# EAGLE board MSP-EXP432P401R_EagleCAD (EAGLE 9.6.0), part 1 of 2
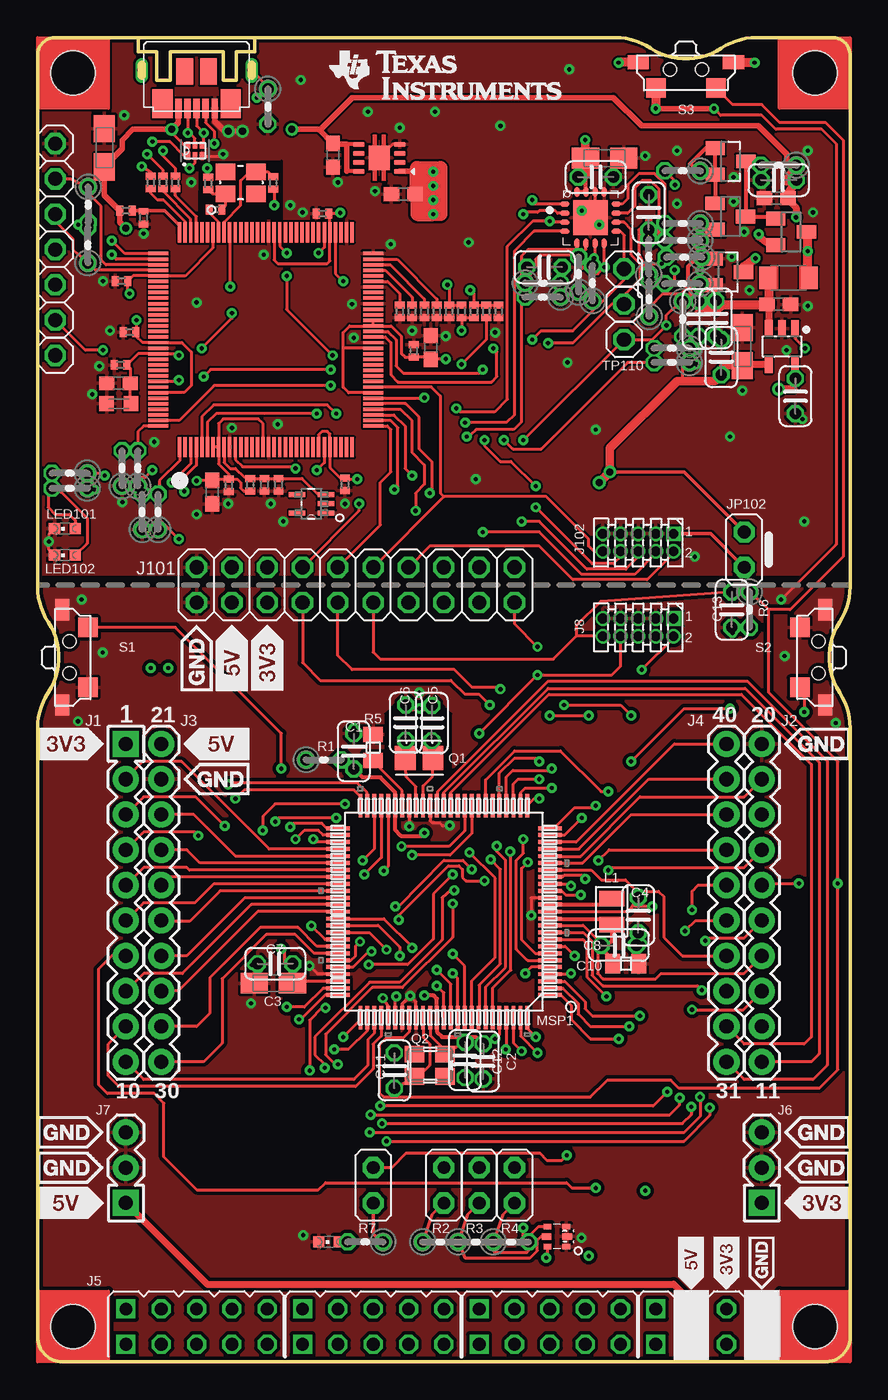
[diagram p0: board, top side]
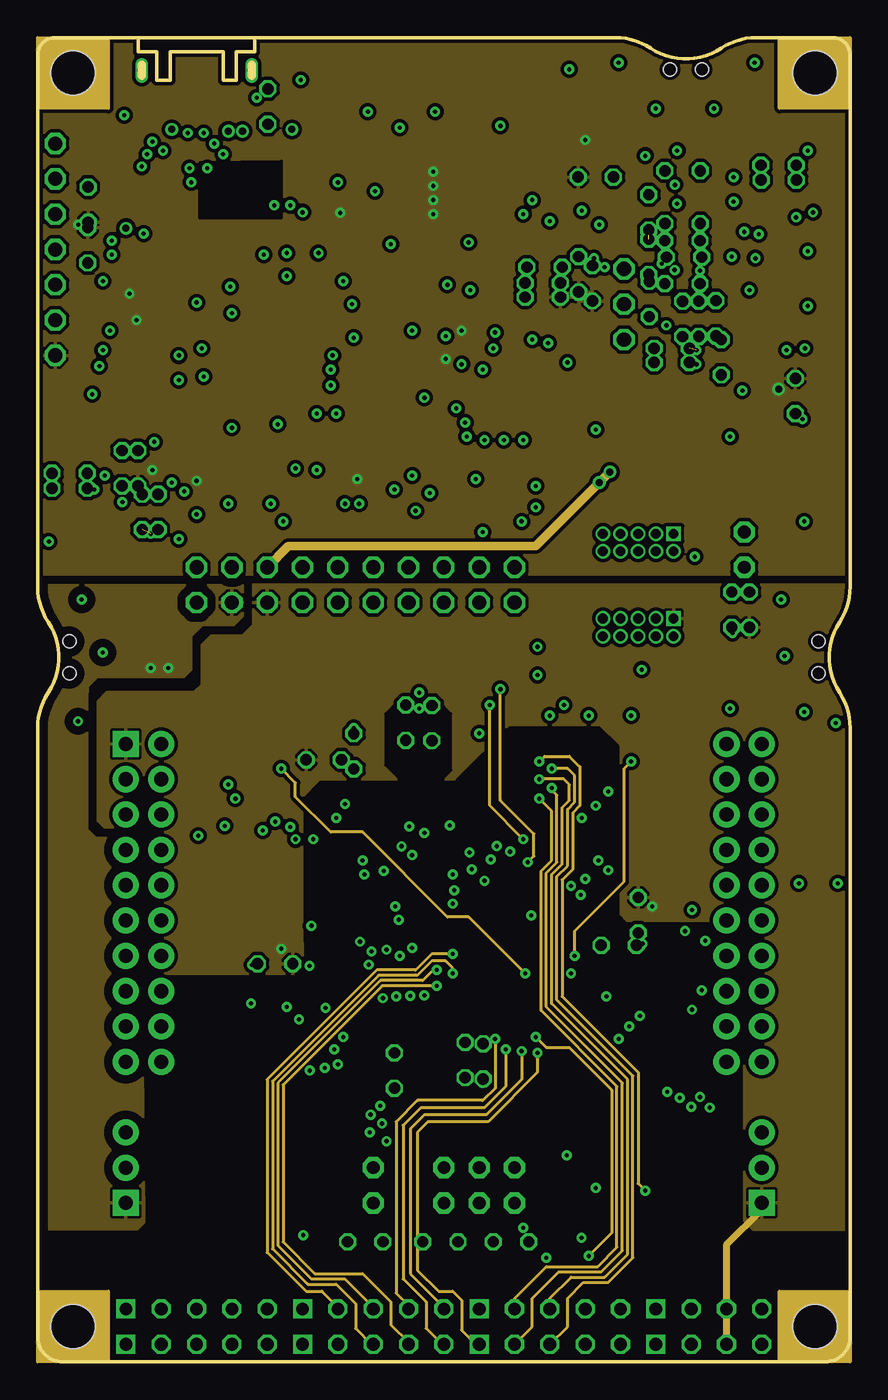
[diagram p1: board, inner layer Mid-Top]
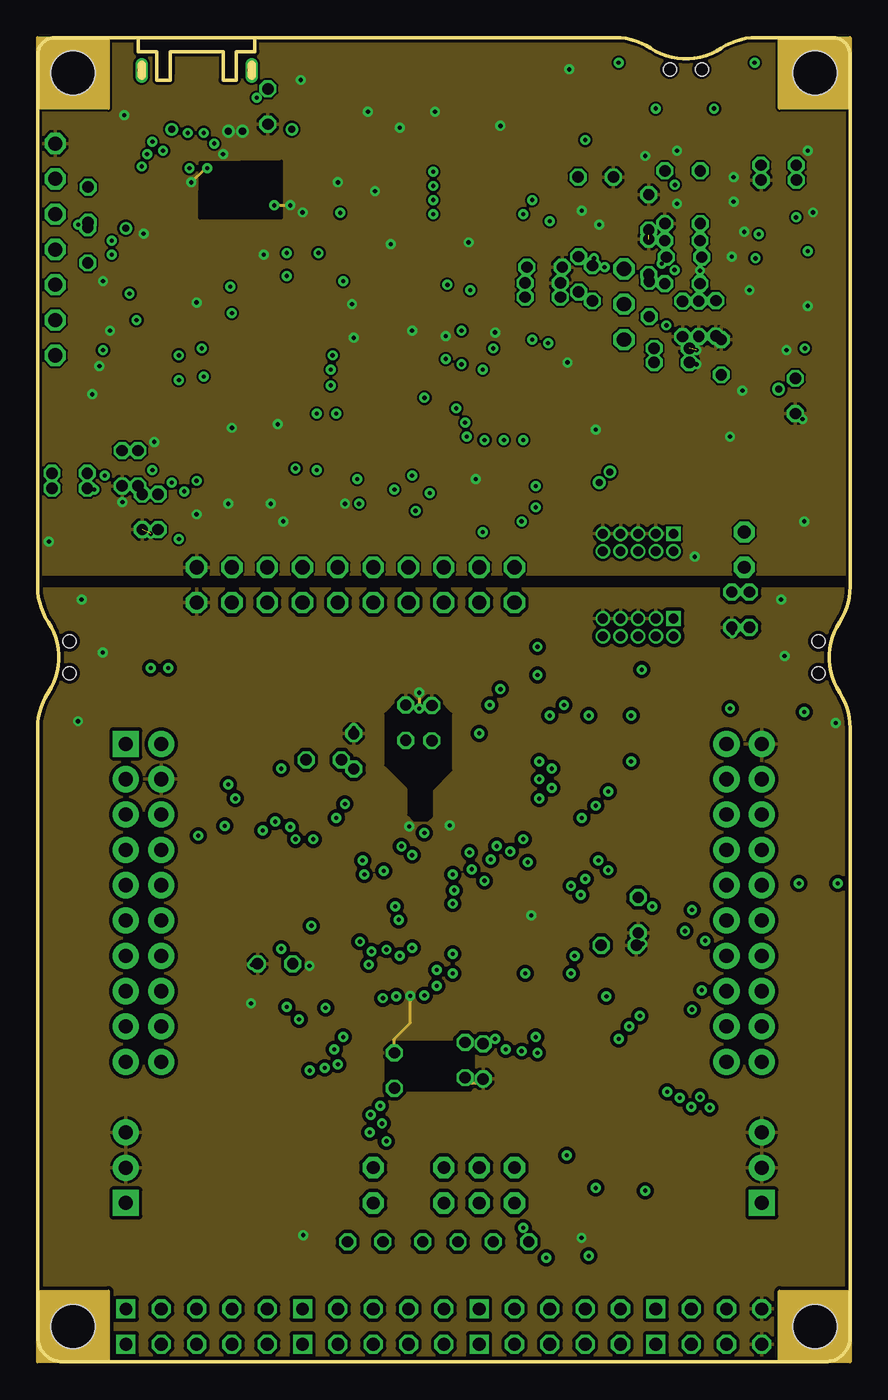
[diagram p2: board, inner layer Mid-Bottom]
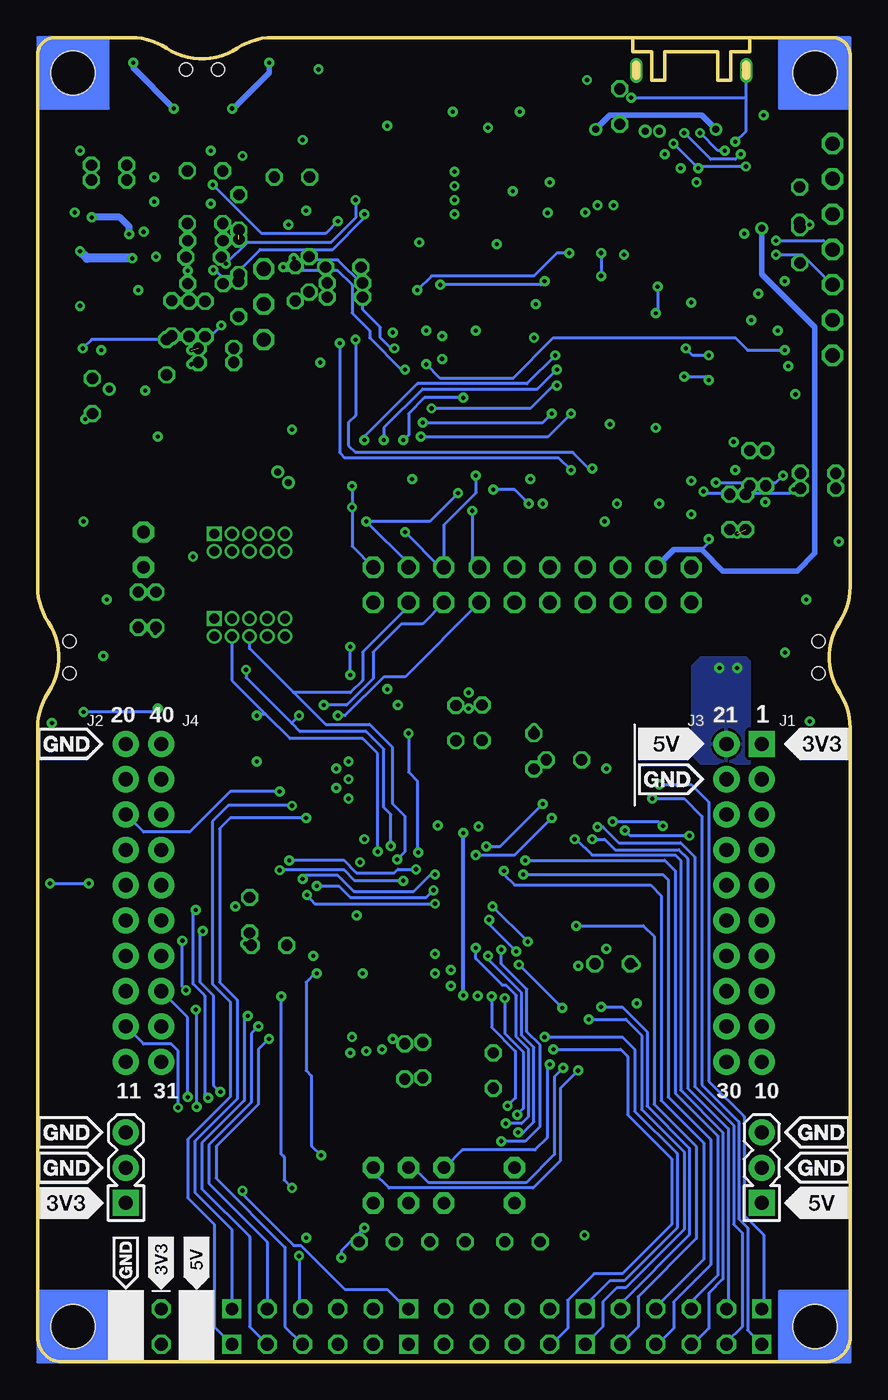
[diagram p3: board, bottom side, seen from below]

Size 58.42 x 95.25 mm. Coordinates in mm from the lower left corner, seen from the top.
Outline: 0,45.59 0,1.8 arc90 1.8,0 56.62,0 arc90 58.42,1.78 58.42,45.59 arc33 57.66,48.13 arc-67 57.66,53.21 arc33 58.42,55.75 58.42,93.98 arc90 57.15,95.25 51.69,95.25 arc33 49.15,94.49 arc-67 44.07,94.49 arc33 41.53,95.25 16.51,95.25 6.35,95.25 1.27,95.25 arc90 0,93.98 0,55.75 arc33 0.76,53.21 arc-67 0.76,48.13 arc33 0,45.59
Copper layers (1+2*15+16): Top 0.0178mm / dielectric 12mil / Mid-Top 0.0356mm / dielectric 27mil / Mid-Bottom 0.0356mm / dielectric 12mil / Bottom 0.0178mm
Design rules "MSP430 PCBExpress 4-layer-dietmar *": minimum track width 6mil, minimum drill 12mil, track to track 6mil, track to pad 6mil, pad to pad 6mil, via to via 8mil, smd to smd 6mil, copper to edge 8mil, drill to drill 8mil, minimum pad ring 0mil, minimum via ring 8mil, stop-mask expansion 8mil, vias tented up to drill 15mil, thermal gap 8mil
Net classes: 0 default: width 0.254 mm; 1 Ground: width 0.203 mm, drill 0.305 mm, clearance 0.152 mm to class 0, clearance 0.152 mm; 2 Power: width 0.203 mm, drill 0.305 mm, clearance 0.152 mm to class 0, clearance 0.152 mm to class 1, clearance 0.152 mm

## Footprints (pad centres in the part's own frame; a part is rotated, then mirrored left to right if it is on the bottom)
C025-024X044 = drill 0.813 octagon: 1 -1.27,0; 2 1.27,0
A/3216-18R = smd 1.95 x 1.5: + 1.375,0; - -1.375,0
CSMD0805 = smd 1.092 x 1.397: 1 -0.94,0; 2 0.94,0
C0402 = smd 0.5 x 0.7: 1 -0.45,0; 2 0.45,0
C0603 = smd 1.1 x 1: 1 -0.85,0; 2 0.85,0
C0603K = smd 1.05 x 1.08: 1 -0.875,0; 2 0.875,0
SOT23 = smd 1 x 1.4: 1 -0.95,-1.1; 2 0.95,-1.1; 3 0,1.1
SON8 = smd 0.85 x 0.35: 1 -1.475,0.975; 2 -1.475,0.325; 3 -1.475,-0.325; 4 -1.475,-0.975; 5 1.475,-0.975; 6 1.475,-0.325; 7 1.475,0.325; 8 1.475,0.975 | smd 1.5 x 1.75: 9 0,0
DRY6 = smd 0.559 x 0.305: 1 -0.356,0.508 | smd 0.508 x 0.305: 2 -0.381,0; 3 -0.381,-0.508; 4 0.381,-0.508; 5 0.381,0; 6 0.381,0.508
SOT23-5 = smd 0.55 x 1.2: 1 -1.204,-0.919; 2 -0.254,-0.919; 3 0.696,-0.919; 4 0.696,1.681; 5 -1.204,1.681
TQFP-128 = smd 1.45 x 0.25: P$1 0,0; P$2 0,-0.4; P$3 0,-0.8; P$4 0,-1.2; P$5 0,-1.6; P$6 0,-2; P$7 0,-2.4; P$8 0,-2.8; P$9 0,-3.2; P$10 0,-3.6; P$11 0,-4; P$12 0,-4.4; P$13 0,-4.8; P$14 0,-5.2; P$15 0,-5.6; P$16 0,-6; P$17 0,-6.4; P$18 0,-6.8; P$19 0,-7.2; P$20 0,-7.6; P$21 0,-8; P$22 0,-8.4; P$23 0,-8.8; P$24 0,-9.2; P$25 0,-9.6; P$26 0,-10; P$27 0,-10.4; P$28 0,-10.8; P$29 0,-11.2; P$30 0,-11.6; P$31 0,-12; P$32 0,-12.4; P$65 15.45,-12.4; P$66 15.45,-12; P$67 15.45,-11.6; P$68 15.45,-11.2; P$69 15.45,-10.8; P$70 15.45,-10.4; P$71 15.45,-10; P$72 15.45,-9.6; P$73 15.45,-9.2; P$74 15.45,-8.8; P$75 15.45,-8.4; P$76 15.45,-8; P$77 15.45,-7.6; P$78 15.45,-7.2; P$79 15.45,-6.8; P$80 15.45,-6.4; P$81 15.45,-6; P$82 15.45,-5.6; P$83 15.45,-5.2; P$84 15.45,-4.8; P$85 15.45,-4.4; P$86 15.45,-4; P$87 15.45,-3.6; P$88 15.45,-3.2; P$89 15.45,-2.8; P$90 15.45,-2.4; P$91 15.45,-2; P$92 15.45,-1.6; P$93 15.45,-1.2; P$94 15.45,-0.8; P$95 15.45,-0.4; P$96 15.45,0 | smd 0.25 x 1.45: P$33 1.525,-13.925; P$34 1.925,-13.925; P$35 2.325,-13.925; P$36 2.725,-13.925; P$37 3.125,-13.925; P$38 3.525,-13.925; P$39 3.925,-13.925; P$40 4.325,-13.925; P$41 4.725,-13.925; P$42 5.125,-13.925; P$43 5.525,-13.925; P$44 5.925,-13.925; P$45 6.325,-13.925; P$46 6.725,-13.925; P$47 7.125,-13.925; P$48 7.525,-13.925; P$49 7.925,-13.925; P$50 8.325,-13.925; P$51 8.725,-13.925; P$52 9.125,-13.925; P$53 9.525,-13.925; P$54 9.925,-13.925; P$55 10.325,-13.925; P$56 10.725,-13.925; P$57 11.125,-13.925; P$58 11.525,-13.925; P$59 11.925,-13.925; P$60 12.325,-13.925; P$61 12.725,-13.925; P$62 13.125,-13.925; P$63 13.525,-13.925; P$64 13.925,-13.925; P$97 13.925,1.525; P$98 13.525,1.525; P$99 13.125,1.525; P$100 12.725,1.525; P$101 12.325,1.525; P$102 11.925,1.525; P$103 11.525,1.525; P$104 11.125,1.525; P$105 10.725,1.525; P$106 10.325,1.525; P$107 9.925,1.525; P$108 9.525,1.525; P$109 9.125,1.525; P$110 8.725,1.525; P$111 8.325,1.525; P$112 7.925,1.525; P$113 7.525,1.525; P$114 7.125,1.525; P$115 6.725,1.525; P$116 6.325,1.525; P$117 5.925,1.525; P$118 5.525,1.525; P$119 5.125,1.525; P$120 4.725,1.525; P$121 4.325,1.525; P$122 3.925,1.525; P$123 3.525,1.525; P$124 3.125,1.525; P$125 2.725,1.525; P$126 2.325,1.525; P$127 1.925,1.525; P$128 1.525,1.525
DCK5 = smd 1.168 x 0.356: 1 -1.041,0.66; 2 -1.041,0; 3 -1.041,-0.66; 4 1.041,-0.66; 5 1.041,0.66
J1 = drill 1.016 pad 1.88 square: 1 0,11.43 | drill 1.016 pad 1.88: 2 0,8.89; 3 0,6.35; 4 0,3.81; 5 0,1.27; 6 0,-1.27; 7 0,-3.81; 8 0,-6.35; 9 0,-8.89; 10 0,-11.43
J2 = drill 1.016 pad 1.88: 11 0,-11.43; 12 0,-8.89; 13 0,-6.35; 14 0,-3.81; 15 0,-1.27; 16 0,1.27; 17 0,3.81; 18 0,6.35; 19 0,8.89; 20 0,11.43
J3 = drill 1.016 pad 1.88: 21 0,11.43; 22 0,8.89; 23 0,6.35; 24 0,3.81; 25 0,1.27; 26 0,-1.27; 27 0,-3.81; 28 0,-6.35; 29 0,-8.89; 30 0,-11.43
J4 = drill 1.016 pad 1.88: 31 0,-11.43; 32 0,-8.89; 33 0,-6.35; 34 0,-3.81; 35 0,-1.27; 36 0,1.27; 37 0,3.81; 38 0,6.35; 39 0,8.89; 40 0,11.43
BOTTOM_CONNECTOR = drill 0.914 square: 1 -24.13,-1.27; 2 -24.13,1.27; 11 -11.43,-1.27; 12 -11.43,1.27; 21 1.27,-1.27; 22 1.27,1.27; 31 13.97,-1.27; 32 13.97,1.27 | drill 0.914 octagon: 3 -21.59,-1.27; 4 -21.59,1.27; 5 -19.05,-1.27; 6 -19.05,1.27; 7 -16.51,-1.27; 8 -16.51,1.27; 9 -13.97,-1.27; 10 -13.97,1.27; 13 -8.89,-1.27; 14 -8.89,1.27; 15 -6.35,-1.27; 16 -6.35,1.27; 17 -3.81,-1.27; 18 -3.81,1.27; 19 -1.27,-1.27; 20 -1.27,1.27; 23 3.81,-1.27; 24 3.81,1.27; 25 6.35,-1.27; 26 6.35,1.27; 27 8.89,-1.27; 28 8.89,1.27; 29 11.43,-1.27; 30 11.43,1.27; 33 16.51,-1.27; 34 16.51,1.27; 35 19.05,-1.27; 36 19.05,1.27; 37 21.59,-1.27; 38 21.59,1.27
3PIN_PWR_3V3 = drill 1.016 pad 1.88 square: 1 0,0 | drill 1.016 pad 1.88: 2 0,2.54; 3 0,5.08
3PIN_PWR_5V = drill 1.016 pad 1.88 square: 1 0,0 | drill 1.016 pad 1.88: 2 0,2.54; 3 0,5.08
ARM-10 = drill 0.7 pad 1 square: 1 -2.54,-0.635 | drill 0.7 pad 1: 2 -2.54,0.635; 3 -1.27,-0.635; 4 -1.27,0.635; 5 0,-0.635; 6 0,0.635; 7 1.27,-0.635; 8 1.27,0.635; 9 2.54,-0.635; 10 2.54,0.635
J101_432 = drill 1.016 octagon: 1 -11.43,-1.27; 2 -11.43,1.27; 3 -8.89,-1.27; 4 -8.89,1.27; 5 -6.35,-1.27; 6 -6.35,1.27; 7 -3.81,-1.27; 8 -3.81,1.27; 9 -1.27,-1.27; 10 -1.27,1.27; 11 1.27,-1.27; 12 1.27,1.27; 13 3.81,-1.27; 14 3.81,1.27; 15 6.35,-1.27; 16 6.35,1.27; 17 8.89,-1.27; 18 8.89,1.27; 19 11.43,-1.27; 20 11.43,1.27
JP1M = drill 0.914 pad 1.524 octagon: 1 0,-1.27; 2 0,1.27
0806 = smd 1.1 x 1.8: 1 -0.94,0; 2 0.94,0
L3216C = smd 1.2 x 1.6: 1 -1.5,0; 2 1.5,0
CHIPLED_0603 = smd 0.8 x 0.8: A 0,-0.75; C 0,0.75
RGB_LED = smd 0.55 x 0.4: 1 -0.675,0.725; 3 -0.675,-0.725; 4 0.675,0.725; 6 0.675,-0.725 | smd 0.7 x 0.5: 2 -0.75,0; 5 0.75,0
PZ100 = smd 1.676 x 0.279: 1 -7.62,5.994; 2 -7.62,5.512; 3 -7.62,5.004; 4 -7.62,4.496; 5 -7.62,3.988; 6 -7.62,3.505; 7 -7.62,2.997; 8 -7.62,2.489; 9 -7.62,2.007; 10 -7.62,1.499; 11 -7.62,0.991; 12 -7.62,0.508; 13 -7.62,0; 14 -7.62,-0.508; 15 -7.62,-0.991; 16 -7.62,-1.499; 17 -7.62,-2.007; 18 -7.62,-2.489; 19 -7.62,-2.997; 20 -7.62,-3.505; 21 -7.62,-3.988; 22 -7.62,-4.496; 23 -7.62,-5.004; 24 -7.62,-5.512; 25 -7.62,-5.994; 51 7.62,-5.994; 52 7.62,-5.512; 53 7.62,-5.004; 54 7.62,-4.496; 55 7.62,-3.988; 56 7.62,-3.505; 57 7.62,-2.997; 58 7.62,-2.489; 59 7.62,-2.007; 60 7.62,-1.499; 61 7.62,-0.991; 62 7.62,-0.508; 63 7.62,0; 64 7.62,0.508; 65 7.62,0.991; 66 7.62,1.499; 67 7.62,2.007; 68 7.62,2.489; 69 7.62,2.997; 70 7.62,3.505; 71 7.62,3.988; 72 7.62,4.496; 73 7.62,5.004; 74 7.62,5.512; 75 7.62,5.994 | smd 0.279 x 1.676: 26 -5.994,-7.62; 27 -5.512,-7.62; 28 -5.004,-7.62; 29 -4.496,-7.62; 30 -3.988,-7.62; 31 -3.505,-7.62; 32 -2.997,-7.62; 33 -2.489,-7.62; 34 -2.007,-7.62; 35 -1.499,-7.62; 36 -0.991,-7.62; 37 -0.508,-7.62; 38 0,-7.62; 39 0.508,-7.62; 40 0.991,-7.62; 41 1.499,-7.62; 42 2.007,-7.62; 43 2.489,-7.62; 44 2.997,-7.62; 45 3.505,-7.62; 46 3.988,-7.62; 47 4.496,-7.62; 48 5.004,-7.62; 49 5.512,-7.62; 50 5.994,-7.62; 76 5.994,7.62; 77 5.512,7.62; 78 5.004,7.62; 79 4.496,7.62; 80 3.988,7.62; 81 3.505,7.62; 82 2.997,7.62; 83 2.489,7.62; 84 2.007,7.62; 85 1.499,7.62; 86 0.991,7.62; 87 0.508,7.62; 88 0,7.62; 89 -0.508,7.62; 90 -0.991,7.62; 91 -1.499,7.62; 92 -2.007,7.62; 93 -2.489,7.62; 94 -2.997,7.62; 95 -3.505,7.62; 96 -3.988,7.62; 97 -4.496,7.62; 98 -5.004,7.62; 99 -5.512,7.62; 100 -5.994,7.62
RSA16 = smd 0.7 x 0.35: 1 -1.85,0.975; 2 -1.85,0.325; 3 -1.85,-0.325; 4 -1.85,-0.975; 9 1.85,-0.975; 10 1.85,-0.325; 11 1.85,0.325; 12 1.85,0.975 | smd 0.35 x 0.7: 5 -0.975,-1.85; 6 -0.325,-1.85; 7 0.325,-1.85; 8 0.975,-1.85; 13 0.975,1.85; 14 0.325,1.85; 15 -0.325,1.85; 16 -0.975,1.85 | smd 2.5 x 2.5: TP 0,0
LF_XTAL = smd 1.75 x 1.5: 1 0,1; 2 0,-1
FA-238 = smd 1.4 x 1.2: 1 -1.1,-0.8; 2 1.1,-0.8; 3 1.1,0.8; 4 -1.1,0.8
NX3225GA = smd 1.4 x 1.2: 1 0,0; 2 2.2,0; 3 2.2,1.6; 4 0,1.6
0204V = drill 0.813 octagon: 1 -1.27,0; 2 1.27,0
0805 = smd 1.092 x 1.397: 1 -0.94,0; 2 0.94,0
R0402 = smd 0.5 x 0.7: 1 -0.45,0; 2 0.45,0
TS-1188E = smd 1.524 x 1.016: G1 -3.429,-0.508; G2 3.429,-0.508 | smd 1.397 x 1.397: S1 -2.159,1.333; S2 2.159,1.333 | hole 0.95: -1.15,0; 1.15,0
SOT23-BEC = smd 1 x 1.4: B -0.95,-1.1; C 0,1.1; E 0.95,-1.1
1X01 = drill 1.016 octagon: 1 0,0
MOUNTHOLE_125MIL = hole 3.175: 0,0
MOLEX_105164-0001 = smd 0.45 x 1.4: D+ 0,-4.1; D- -0.65,-4.1; GND 1.3,-4.1; ID 0.65,-4.1; VBUS -1.3,-4.1 | smd 1.45 x 2.1: SHIELD1 -2.45,-3.75; SHIELD4 2.45,-3.75 | smd 1.2 x 1.9: SHIELD2 -0.85,-1.45; SHIELD3 0.85,-1.45 | drill 0.6 long: SHIELD_TH1 -3.95,-1.35; SHIELD_TH2 3.95,-1.35

## Placement (x,y rotation side)
C1  100n  [C025-024X044]  22.73,43.92 90 top
C2  100n  [C025-024X044]  32.03,21.62 270 top
C3  10u  [A/3216-18R]  16.95,27.24 0 top
C4  100n  [C025-024X044]  43.18,32.13 270 top
C5  22p  [C025-024X044]  28.35,45.95 90 top
C6  22p  [C025-024X044]  26.47,45.97 90 top
C7  100n  [C025-024X044]  17.08,28.64 180 top
C8  100n  [C025-024X044]  41.78,29.97 0 top
C10  4u7  [CSMD0805]  42.29,28.64 0 top
C11  22p  [C025-024X044]  25.65,20.96 90 top
C12  22p  [C025-024X044]  30.73,21.72 270 top
C13  1n  [C025-024X044]  49.91,54.1 270 top
C101  12pF  [C0402]  12.27,84.76 90 top
C102  12pF  [C0402]  16.94,84.79 270 top
C103  0.1uF  [C0402]  29.59,75.56 270 top
C104  10n  [C0402]  13.74,63.04 270 top
C105  2u2  [C0603]  26.29,83.98 180 top
C106  4.7u  [A/3216-18R]  40.77,86.58 180 top
C107  1u  [C0603]  12.55,62.56 270 top
C108  DNP  [C0402]  33.15,75.56 270 top
C110  10n  [C0402]  17.32,63.09 270 top
C111  100n  [C0402]  16.31,63.09 270 top
C112  10n  [C0402]  22.1,63.12 270 top
C113  100n  [C0402]  27.05,72.71 90 top
C114  10n  [C0402]  6.62,74.07 180 top
C115  33p  [C025-024X044]  43.94,82.68 270 top
C116  33p  [C025-024X044]  36.45,78.74 180 top
C117  4.7u  [C0603]  53.1,83.7 180 top
C118  100n  [C025-024X044]  53.28,85 180 top
C119  4.7u  [C0603]  53.29,76.06 0 top
C120  100n  [C025-024X044]  47.53,75.03 270 top
C121  100n  [C0402]  20.47,82.58 180 top
C123  10n  [C0402]  6.03,77.72 180 top
C124  100n  [C025-024X044]  40.13,85.22 0 top
C126  220n  [C025-024X044]  54.48,69.47 270 top
C127  220n  [C025-024X044]  48.77,75.06 270 top
C128  47u  [A/3216-18R]  50.67,73.03 270 top
C129  100n  [C025-024X044]  49.15,72.26 90 top
C130  1u  [C0603]  28.26,72.96 270 top
C131  0.1uF  [C0402]  5.97,71.7 180 top
C132  1u  [C0603]  5.82,70.38 0 top
C133  2.2uF  [C0603K]  5.84,68.91 180 top
C140  4.7u  [A/3216-18R]  4.8,87.33 270 top
C141  1u  [C0603]  21.24,86.78 270 top
C150  0.1uF  [C0402]  7.62,82.3 270 top
D101  BAS40-05  [SOT23]  49.82,86.34 270 top
D102  BAS40-05  [SOT23]  49.65,78.39 270 top
IC101  TPS73533DRB  [SON8]  24.56,86.6 180 top
IC102  TPD4E004_DRY_6  [DRY6]  11.32,87.12 90 top
IC103  TPS2102DBV  [SOT23-5]  53.26,73.41 180 top
IC106  TM4C129ENCPDT  [TQFP-128]  10.21,65.79 90 top
IC107  LM4040B25_DCK_5  [DCK5]  19.68,61.72 180 top
J1  [J1]  6.35,33.02 0 top
J2  [J2]  52.07,33.02 0 top
J3  [J3]  8.89,33.02 0 top
J4  [J4]  49.53,33.02 0 top
J5  EDGE_CON  [BOTTOM_CONNECTOR]  30.48,2.54 0 top
J6  HEADER 1X03  [3PIN_PWR_3V3]  52.07,11.43 0 top
J7  BP_HEADERS_PWR_5V  [3PIN_PWR_5V]  6.35,11.43 0 top
J8  [ARM-10]  43.18,52.83 180 top
J101  J101_432  [J101_432]  22.86,55.88 0 top
J102  [ARM-10]  43.18,58.93 180 top
JP8  LED1  [JP1M]  24.13,12.7 180 top
JP9  LED2_RED  [JP1M]  29.21,12.7 180 top
JP10  LED2_GREEN  [JP1M]  31.75,12.7 180 top
JP11  LED2_BLUE  [JP1M]  34.29,12.7 180 top
JP102  [JP1M]  50.8,58.42 180 top
L1  4.7uH  [0806]  41.27,32.38 90 top
L101  2u2  [L3216C]  53.99,77.97 180 top
LED1  [CHIPLED_0603]  20.96,8.64 90 top
LED2  EVERLIGHT_19-337  [RGB_LED]  37.34,9.02 180 top
LED101  [CHIPLED_0603]  1.97,59.94 90 top
LED102  [CHIPLED_0603]  1.97,58.03 90 top
MSP1  MSP432  [PZ100]  29.21,32.38 180 top
MSP101  MSP430G2452IRSA16R  [RSA16]  39.75,82.3 0 top
Q1  [LF_XTAL]  27.43,43.43 90 top
Q2  [FA-238]  28.19,21.34 180 top
Q101  NX3225GA_OSC  [NX3225GA]  13.51,84 0 top
R1  0R  [0204V]  20.57,43.31 0 top
R2  110R  [0204V]  28.96,8.64 0 top
R3  16R  [0204V]  31.5,8.64 0 top
R4  24R  [0204V]  34.04,8.64 0 top
R5  91kOhm, 0.1%, 25ppm/C  [0805]  24.13,44.2 90 top
R6  47k  [0204V]  51.18,54.1 270 top
R7  470  [0204V]  23.56,8.64 180 top
R101  DNP  [0204V]  45.59,72.9 180 top
R102  100  [R0402]  32.26,75.56 90 top
R103  10k  [R0402]  31.37,75.56 90 top
R104  51  [R0402]  30.48,75.56 90 top
R105  1k 1%  [R0402]  15.29,63.09 270 top
R106  2R  [R0402]  12.78,82.88 180 top
R107  47k  [0204V]  46.37,75.01 270 top
R108  1k  [R0402]  28.7,75.56 90 top
R109  1k  [R0402]  27.81,75.56 90 top
R110  1k  [R0402]  26.92,75.56 90 top
R111  470  [0204V]  2.31,63.92 180 top
R112  220k  [0204V]  43.97,76.45 90 top
R113  220k  [0204V]  43.95,79.48 90 top
R114  220k  [0204V]  36.32,76.58 180 top
R115  220k  [0204V]  36.32,77.6 0 top
R116  4k7  [0204V]  39.89,77.58 90 top
R117  4k7  [0204V]  38.9,78.22 90 top
R118  820  [0204V]  46.37,85.66 180 top
R119  0  [0204V]  46.37,81.88 180 top
R120  470  [0204V]  53.28,86.07 180 top
R123  33  [0204V]  16.56,90.29 270 top
R124  470  [0204V]  2.31,62.83 180 top
R125  10k  [0204V]  3.63,83.24 270 top
R126  2k2  [0204V]  46.35,80.64 180 top
R127  3k3  [0204V]  46.35,77.55 180 top
R128  6k8  [0204V]  46.48,79.45 180 top
R129  10k  [0204V]  3.61,80.31 90 top
R131  0  [R0402]  8.13,84.84 270 top
R132  330k  [0204V]  8.66,61.14 90 top
R133  220k  [0204V]  7.52,61.14 90 top
R134  DNP  [0204V]  45.59,71.88 180 top
R135  220k  [0204V]  7.21,64.27 90 top
R136  220k  [0204V]  6.07,64.27 90 top
R137  0  [R0402]  9.02,84.84 270 top
R138  0  [R0402]  9.91,84.84 270 top
R139  dnp  [R0402]  26.04,75.56 90 top
R140  51  [R0402]  6.35,82.8 0 top
S1  [TS-1188E]  2.29,50.67 270 top
S2  [TS-1188E]  56.13,50.67 90 top
S3  [TS-1188E]  46.61,92.96 180 top
T101  DMG1013UW  [SOT23]  54.17,81.27 270 top
T102  BC850CW-115  [SOT23-BEC]  49.81,82.37 270 top
TP101  TEST_PIN2  [1X01]  1.27,87.63 270 top
TP102  TEST_PIN2  [1X01]  1.27,85.09 270 top
TP103  TEST_PIN2  [1X01]  1.27,82.55 270 top
TP104  TEST_PIN2  [1X01]  1.27,80.01 270 top
TP105  TEST_PIN2  [1X01]  1.27,77.47 270 top
TP106  TEST_PIN2  [1X01]  1.27,74.93 270 top
TP107  TEST_PIN2  [1X01]  1.27,72.39 0 top
TP108  TEST_PIN2  [1X01]  42.16,78.61 0 top
TP109  TEST_PIN2  [1X01]  42.16,76.07 0 top
TP110  TEST_PIN2  [1X01]  42.16,73.53 0 top
U$1  MOUNTHOLE_125MIL  [MOUNTHOLE_125MIL]  2.54,2.54 0 top
U$2  MOUNTHOLE_125MIL  [MOUNTHOLE_125MIL]  55.88,2.54 0 top
U$3  MOUNTHOLE_125MIL  [MOUNTHOLE_125MIL]  2.54,92.71 0 top
U$4  [LOGO16_TPLACE]  20.89,90.63 0 top
U$5  MOUNTHOLE_125MIL  [MOUNTHOLE_125MIL]  55.88,92.71 0 top
U$7  MIKE_TM  [MIKE_TM]  29.21,31.11 0 top
U$8  P401R_REARSILK_REV2_1  [P401R_REARSILK_REV2_1]  0,55.88 0 top
U$9  REAR_TILOGO  [REAR_TILOGO]  16.64,30.78 0 top
U$10  COMPLIANCE_SUITESYMBOLONLY  [EVM_COMPLIANCESUITE_SYMBOLONLY]  18.8,5.38 0 top
U$11  COMPLIANCE_FCC_TEXTREAR  [COMPLIANCE_FCC_TEXT]  19.05,4.83 0 top
U$12  LOGO-ROCKET  [LOGO-ROCKET]  10.03,12.95 0 top
U$13  P401R_SILKLABEL  [SILKLABELUPDATED]  45.72,0 0 top
USB101  [MOLEX_105164-0001]  11.43,94.25 0 top

## Library data of the parts
C1-C8 C11-C13 C105-C107 C115-C120 C124 C126-C130 C132 C140 C141 = rcl; SPICEPREFIX: C
C10 IC101 IC103 IC106 J1-J5 J7 J101 L1 LED2 MSP1 MSP101 Q1 Q2 Q101 R5 S1-S3 T101 T102 TP101-TP110 U$1-U$3 U$5 U$7-U$13 USB101 = MSP-EXP432P401R_EagleCAD
C101 C102 = MSP-EXP432P401R_EagleCAD; GNUM: G10-C0402-C120-AAC
C103 C104 C108 C110-C114 C121 C123 C131 C150 = MSP-EXP432P401R_EagleCAD; GNUM: G10-C0402-C104-HBA
C133 = MSP-EXP432P401R_EagleCAD; DIGIKEY_PARTNUM: 311-1451-2-ND; GNUM: G10-C0603-C225-HBB
D101 D102 = diode
IC102 = MSP-EXP432P401R_EagleCAD; DATASHEETURL: http://www.ti.com/lit/gpn/TPD4E004; DESCRIPTION: 4-Channel ESD Protection Array for High-Speed Data Interfaces; FAMILY_NAME: ESD Solution; GENERIC_PART_NUMBER: TPD4E004; INDUSTRY_STD_PKG_TYPE: SON; MANUFACTURER: Texas Instruments; MANUFACTURER_PART_NUMBER: tpd4e004_dry_6; PACKAGE_DESIGNATOR: DRY; PIN_COUNT: 6; VENDOR: Texas Instruments
IC107 = MSP-EXP432P401R_EagleCAD; DATASHEETURL: http://www.ti.com/lit/gpn/LM4040B25; DESCRIPTION: 2.5-V Precision Micropower Shunt Voltage Reference, 0.2% accuracy; FAMILY_NAME: SHUNT VOLTAGE REFERENCE; GENERIC_PART_NUMBER: LM4040B25; INDUSTRY_STD_PKG_TYPE: SC70; MANUFACTURER: Texas Instruments; MANUFACTURER_PART_NUMBER: lm4040b25_dck_5; PACKAGE_DESIGNATOR: DCK; PIN_COUNT: 5; VENDOR: Texas Instruments
J6 = MSP-EXP432P401R_EagleCAD; CCO: 258-0001299; DESCRIPTION: CONN HEADER .100 SINGL STR 3POS; MAN: SULLINS
J8 J102 = MSP-EXP432P401R_EagleCAD; SAMTEC: FTSH-105-01-F-D-K
JP8-JP11 JP102 = jumper
L101 = rcl; SPICEPREFIX: L
LED1 LED101 LED102 = led
R1-R4 R6 R7 R101 R107 R111-R120 R123-R129 R132-R136 = rcl; SPICEPREFIX: R
R102 R108-R110 = MSP-EXP432P401R_EagleCAD; GNUM: G11-R0402-1000-AAA
R103 = MSP-EXP432P401R_EagleCAD; GNUM: G11-R0402-1002-AAA
R104 R105 R131 R137 R138 R140 = MSP-EXP432P401R_EagleCAD; GNUM: G11-R0402-51R0-AAA
R106 R139 = MSP-EXP432P401R_EagleCAD; GNUM: G11-R0402-R202-AAA
U$4 = sti_logo

## Nets
!RST: C13.1 J2.16 J8.10 J101.11 MSP1.83 R6.1 S3.S1
+3V3: C3.+ C4.1 C7.1 J1.1 J5.35 J5.36 J6.1 J8.1 J101.5 MSP1.13 MSP1.73 R1.1 R6.2
+5V [Power]: J3.21 J5.33 J5.34 J7.1 J101.3
AVCC: C116.2 MSP101.6 R114.2 R115.1
AVCCOUT: C115.2 MSP101.1 R112.2 R113.1
DCDCCAL0: MSP101.12 R126.2
DCDCCAL1: MSP101.2 R127.2
DCDCCAL2: MSP101.11 R128.2
DCDCIO0: IC106.P$5 MSP101.4
DCDCIO1: IC106.P$6 MSP101.5
DCDCPULSE: IC106.P$127 MSP101.3 R118.2
DCDCRST: IC106.P$11 MSP101.9 TP108.1
DCDCTEST: IC106.P$27 MSP101.10 TP109.1
DCOR: MSP1.44 R5.1
DEBUG_TRIGGER_0: IC106.P$44
DEBUG_TRIGGER_1: IC106.P$45
EXTERNAL_DEBUG: IC106.P$41
HOSTSCL: IC106.P$49 MSP101.7 R117.2
HOSTSDA: IC106.P$50 MSP101.8 R116.2
IRSTN: R102.1 TP106.1
ITCK: IC106.P$100 R129.1 TP103.1
ITDI: IC106.P$98 TP105.1
ITDO: IC106.P$97 TP104.1
ITMS: IC106.P$99 R125.1 TP102.1
LED0: IC106.P$3 R111.1
LED1: IC106.P$4 R124.1
N$1: J102.1 JP102.2
N$3: IC106.P$63 R108.2
N$4: LED102.A R124.2
N$6: C1.1 C2.1 MSP1.45 MSP1.87 R1.2
N$7: LED101.A R111.2
N$8: JP9.2 R2.1
N$9: LED2.5 R2.2
N$10: LED2.6 R3.2
N$11: LED2.4 R4.2
N$12: R119.1 T102.E
N$13: D101.1 D101.2 R118.1 T102.B
N$15: D102.3 L101.1 T101.3
N$16: D101.3 R120.2 T101.1 T102.C
N$17: LED1.A R7.2
N$19: JP10.2 R3.1
N$21: IC106.P$93 R138.2
N$22: IC106.P$61 R110.2
N$23: IC106.P$95 R131.2
N$25: JP11.2 R4.1
N$27: IC106.P$62 R109.2
N$29: JP8.2 R7.1
N$34: C6.1 MSP1.42 Q1.1
N$38: C5.1 MSP1.41 Q1.2
N$47: IC106.P$59 R139.2
OSC0: C102.1 IC106.P$88 Q101.3
OSC1: IC106.P$89 R106.2
OSC1_R: C101.1 Q101.1 R106.1
P1.0_LED1: JP8.1 MSP1.4
P1.1_BUTTON1: MSP1.5 S1.S1
P1.2_BCLUART_RXD: J101.7 MSP1.6
P1.3_BCLUART_TXD: J101.9 MSP1.7
P1.4_BUTTON2: MSP1.8 S2.S1
P1.5_SPICLK_J1.7: J1.7 MSP1.9
P1.6_SPIMOSI_J2.15: J2.15 MSP1.10
P1.7_SPIMISO_J2.14: J2.14 MSP1.11
P2.0_RGBLED_RED: JP9.1 MSP1.16
P2.1_RGBLED_GREEN: JP10.1 MSP1.17
P2.2_RGBLED_BLUE: JP11.1 MSP1.18
P2.3_IO_J4.34: J4.34 MSP1.19
P2.4_PWM_J4.38: J4.38 MSP1.20
P2.5_PWM_J2.19: J2.19 MSP1.21
P2.6_PWM_J4.39: J4.39 MSP1.22
P2.7_PWM_J4.40: J4.40 MSP1.23
P3.0_IO_J2.18: J2.18 MSP1.32
P3.1: MSP1.33
P3.2_URXD_J1.3: J1.3 MSP1.34
P3.3_UTXD_J1.4: J1.4 MSP1.35
P3.4: MSP1.36
P3.5_IO_J4.32: J4.32 MSP1.37
P3.6_IO_J2.11: J2.11 MSP1.38
P3.7_IO_J4.31: J4.31 MSP1.39
P4.0_A13_J3.24: J3.24 MSP1.56
P4.1_IO_J1.5: J1.5 MSP1.57
P4.2_A11_J3.25: J3.25 MSP1.58
P4.3_A10_J1.6: J1.6 MSP1.59
P4.4_A9_J3.26: J3.26 MSP1.60
P4.5_A8_J3.27: J3.27 MSP1.61
P4.6_IO_J1.8: J1.8 MSP1.62
P4.7_A6_J3.28: J3.28 MSP1.63
P5.0_IO_J2.13: J2.13 MSP1.64
P5.1_IO_J4.33: J4.33 MSP1.65
P5.2/XT2IN: C12.1 MSP1.86 Q2.1
P5.2_IO_J2.12: J2.12 MSP1.66
P5.3: J5.9 MSP1.67
P5.3/XT2OUT: C11.1 MSP1.85 Q2.3
P5.4_IO_J3.29: J3.29 MSP1.68
P5.5_IO_J3.30: J3.30 MSP1.69
P5.6_PWM_J4.37: J4.37 MSP1.70
P5.7_IO_J2.17: J2.17 MSP1.71
P6.0_A15_J1.2: J1.2 MSP1.54
P6.1_A14_J3.23: J3.23 MSP1.55
P6.2: J5.12 MSP1.76
P6.3: J5.13 MSP1.77
P6.4_I2CSDA_J1.10: J1.10 MSP1.78
P6.5_I2CSCL_J1.9: J1.9 MSP1.79
P6.6_CAPTURE_J4.36: J4.36 MSP1.80
P6.7_CAPTURE_J4.35: J4.35 MSP1.81
P7.0: J5.17 MSP1.88
P7.1: J5.16 MSP1.89
P7.2: J5.15 MSP1.90
P7.3: J5.14 MSP1.91
P7.4: J5.24 MSP1.26
P7.5: J5.23 MSP1.27
P7.6: J5.26 MSP1.28
P7.7: J5.25 MSP1.29
P8.0: J5.22 MSP1.30
P8.1: MSP1.31
P8.2: J5.8 MSP1.46
P8.3: J5.7 MSP1.47
P8.4: J5.6 MSP1.48
P8.5: J5.2 MSP1.49
P8.6: J5.1 MSP1.50
P8.7: J5.3 MSP1.51
P9.0: J5.4 MSP1.52
P9.1: J5.5 MSP1.53
P9.2: J5.10 MSP1.74
P9.3: J5.11 MSP1.75
P9.4: J5.18 MSP1.96
P9.5: J5.19 MSP1.97
P9.6: J5.20 MSP1.98
P9.7: J5.21 MSP1.99
P10.0: J5.28 MSP1.100
P10.1: J5.27 MSP1.1
P10.2: J5.30 MSP1.2
P10.3: J5.29 MSP1.3
P10.4: J5.32 MSP1.24
P10.5: J5.31 MSP1.25
P96VBUS: C150.1 IC106.P$96 R140.2
REF_MAIN_LDO: IC106.P$128 R135.2 R136.2
REF_TARGET_VCC: IC106.P$120 R101.2 R134.2
TCK_SWDCLK: J8.4 J101.15 MSP1.95
TDI: J8.8 J101.19 MSP1.92
TDO_SWO: J8.6 J101.17 MSP1.93
TMS_SWDIO: J8.2 J101.13 MSP1.94
USB0CLK: IC106.P$92
USB0D0: IC106.P$81
USB0D1: IC106.P$82
USB0D2: IC106.P$83
USB0D3: IC106.P$84
USB0D4: IC106.P$85
USB0D5: IC106.P$86
USB0D6: IC106.P$106
USB0D7: IC106.P$105
USBDIR: IC106.P$104
USBNXT: IC106.P$103
USBSTP: IC106.P$91
VBUS_DETECT: IC106.P$1 R132.2 R133.2
VCCEN1: IC103.1 IC106.P$78 R107.1 TP110.1
VCCEN2: IC106.P$77
VCORE: C8.1 C10.1 L1.1 MSP1.12
VDDC: C131.1 C132.2 C133.1 IC106.P$87 IC106.P$115
VREFA+: C110.1 C111.1 IC106.P$9 IC107.3 R105.1
VSW: L1.2 MSP1.14
XDS-GND: C1.2 C2.2 C3.- C4.2 C5.2 C6.2 C7.2 C8.2 C10.2 C11.2 C12.2 C13.2 J2.20 J3.22 J5.37 J5.38 J6.2 J6.3 J7.2 J7.3 J8.3 J8.5 J8.7 J8.9 J101.1 LED1.C LED2.1 LED2.2 LED2.3 MSP1.15 MSP1.40 MSP1.43 MSP1.72 MSP1.82 MSP1.84 R5.2 S1.G1 S1.G2 S1.S2 S2.G1 S2.G2 S2.S2 S3.G1 S3.G2 S3.S2
XDSET_!RST: C108.1 IC106.P$70 R102.2 R103.2
XDSET_CTS: IC106.P$30
XDSET_DM: IC102.5 R138.1 USB101.D-
XDSET_DP: IC102.4 R137.1 USB101.D+
XDSET_DPR: IC106.P$94 R137.2
XDSET_GND: C101.2 C102.2 C103.2 C104.2 C105.2 C106.- C107.2 C108.2 C110.2 C111.2 C112.2 C113.2 C114.2 C115.1 C116.1 C117.2 C118.2 C119.2 C120.2 C121.2 C123.2 C124.2 C126.2 C127.2 C128.- C129.2 C130.1 C131.2 C132.1 C133.2 C140.- C141.2 C150.2 D102.1 D102.2 IC101.4 IC101.9 IC102.3 IC103.2 IC106.P$10 IC106.P$17 IC106.P$48 IC106.P$55 IC106.P$58 IC106.P$64 IC106.P$66 IC106.P$80 IC106.P$114 IC107.1 J101.2 J102.3 J102.5 J102.7 J102.9 LED101.C LED102.C MSP101.13 MSP101.14 MSP101.TP R101.1 R107.2 R108.1 R109.1 R110.1 R113.2 R115.2 R119.2 R123.2 R133.1 R136.1 R139.1 TP101.1 USB101.GND
XDSET_ID: IC102.2 R131.1 USB101.ID
XDSET_RESET_OUT: IC106.P$40 J101.12 J102.10
XDSET_RTS: IC106.P$29
XDSET_RXD: IC106.P$33 J101.10
XDSET_SHIELD: IC102.1 R123.1 USB101.SHIELD_TH1 USB101.SHIELD_TH2
XDSET_TCK_SWDCLK: IC106.P$35 J101.16 J102.4
XDSET_TDI: IC106.P$38 J101.20 J102.8
XDSET_TDO_SWO: IC106.P$37 J101.18 J102.6
XDSET_TMS_SWDIO: IC106.P$36 J101.14 J102.2
XDSET_TXD: IC106.P$34 J101.8
XDSET_VBAT: C103.1 IC106.P$68 R104.2
XDSET_VBUS: C117.1 C118.1 C140.+ C141.1 IC101.5 IC101.8 IC102.6 J101.4 R120.1 R132.1 R140.1 T101.2 USB101.VBUS
XDSET_VCC: C104.1 C105.1 C106.+ C107.1 C112.1 C113.1 C114.1 C121.1 C123.1 C124.1 C126.1 C130.2 IC101.1 IC103.5 IC106.P$7 IC106.P$8 IC106.P$16 IC106.P$26 IC106.P$28 IC106.P$39 IC106.P$47 IC106.P$51 IC106.P$52 IC106.P$69 IC106.P$79 IC106.P$90 IC106.P$101 IC106.P$113 IC106.P$122 MSP101.15 MSP101.16 R103.1 R104.1 R105.2 R114.1 R116.1 R117.1 R125.2 R129.2 R135.1 TP107.1
XDSET_VCCOUT: C119.1 C120.1 C127.1 IC103.3 L101.2 R112.1 R126.1 R127.1 R128.1
XDSET_VCCTARGET: C128.+ C129.1 IC103.4 J101.6 JP102.1 R134.1